# Altium PCB glasses_full_v1_small_revised.PcbDoc (part 2 of 2)
Units mm, origin at the board's own origin, x right, y up, seen from the top; angles counter-clockwise.
Board outline 153.91 x 57.09 mm, 2 copper layers (Top Layer, Bottom Layer); 20 components, 42 nets, 149 pads, 104 vias.
Unrouted connection lines stored in the file: 17.
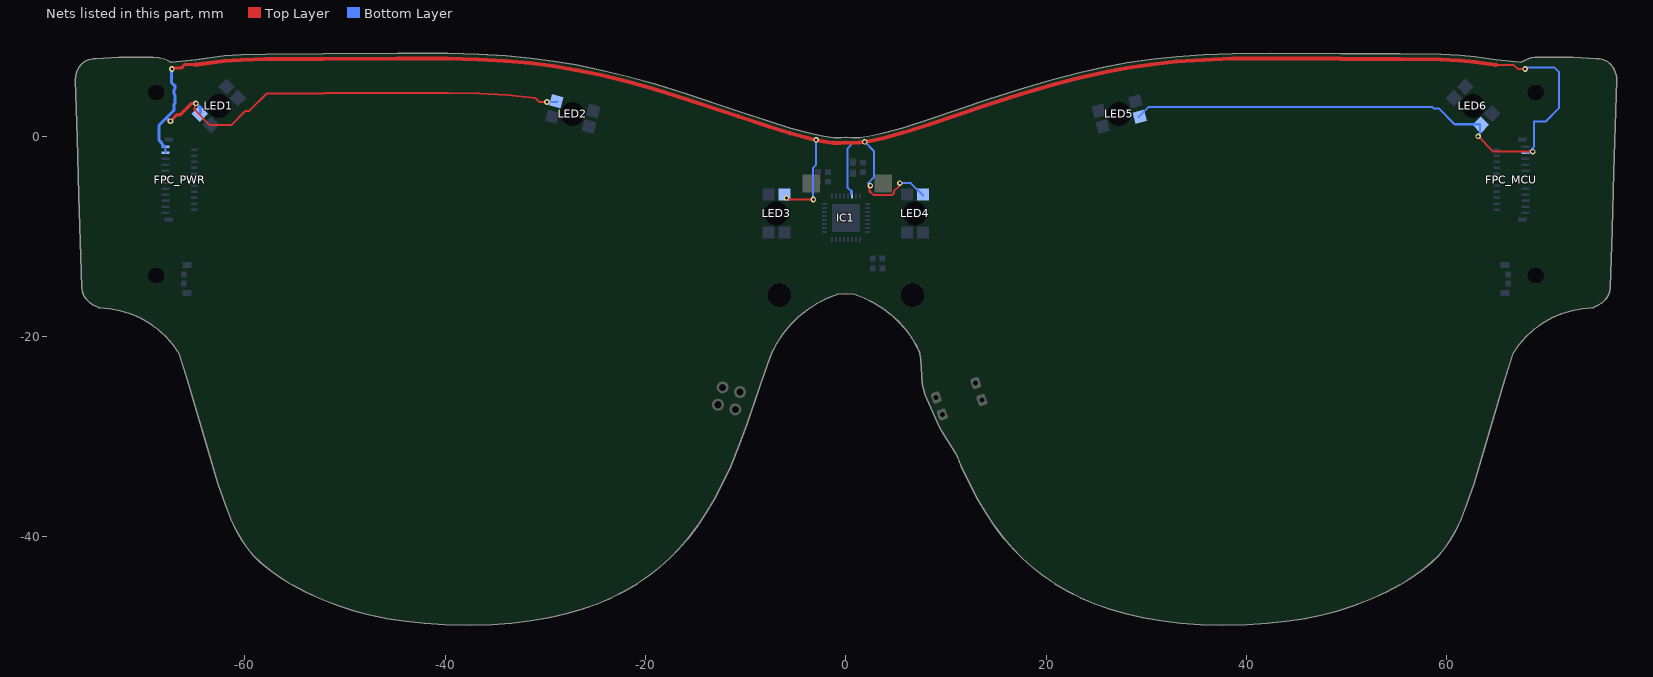
[diagram p2: the nets of this part, all layers, seen from the top]

## Via types
v1: diameter 0.559, hole 0.305, Top Layer to Bottom Layer, tented both sides, 100 vias
v2: diameter 0.559, hole 0.305, Top Layer to Bottom Layer, tented top, 4 vias

## Nets (pads, with @x,y where several pads share a name; then routed paths per layer and width w, separated by ;. In a path a pad name is that pad's centre, name@x,y a point inside that pad or via, vN(x,y) a via of type N, cw(c..) or ccw(c..) an arc to the next point about the centre after c; other vN are vias at no path point) (continued)
VBAT: FPC_MCU.3 FPC_PWR.21 FPC_PWR.23 IC1.30 LED1.1 LED2.1 LED3.1 LED4.1 LED5.1 LED6.1 | length 276.8
  Top Layer w0.203: v1(-64.897,3.302) -65.081,2.698 -63.5,1.118 -61.366,1.118 -59.944,2.54 -59.56,2.54 -57.822,4.279 -52.078,4.306 -44.635,4.353 -39.663,4.347 -36.586,4.266 -33.84,4.108 -31.024,3.846 -30.607,3.429 v1(-29.845,3.429) ; v1(-5.944,-6.147) -5.89,-6.147 -5.74,-6.297 -5.74,-6.299 v1(-3.251,-6.299) ; v1(2.438,-4.928) 2.438,-4.877 2.337,-4.775 2.337,-5.537 cw(c2.337,-5.782) 2.51,-5.609 2.769,-5.867 4.606,-5.867 4.79,-5.683 4.79,-5.495 5.408,-4.877 5.385,-4.854 v1(5.385,-4.674) ; v1(63.119,0) 64.643,-1.524 v1(68.58,-1.524) ; 64.904,7.148 66.649,7.148 67.066,6.731 v1(67.818,6.731)
  Top Layer w0.305: v1(-67.437,1.524) -66.802,2.159 -66.456,2.159 -65.313,3.302 v1(-64.897,3.302) ; v1(-67.3,6.731) -67.224,6.807 -66.364,6.807 -65.983,7.188 -64.962,7.188 -64.925,7.151
  Top Layer w0.406: -64.925,7.151 -62.084,7.518 -60.385,7.64 -57.949,7.708 -52.205,7.735 -44.762,7.782 -39.79,7.776 -36.713,7.695 -33.967,7.537 -31.529,7.31 -29.23,7.011 -26.979,6.633 -24.455,6.113 -21.824,5.469 -18.995,4.677 -15.829,3.695 -10.776,2.006 -7.721,0.984 -5.567,0.311 -3.625,-0.217 v1(-2.975,-0.354) -2.252,-0.507 -1.238,-0.64 -0.568,-0.661 -0.019,-0.608 0.416,-0.649 ; 0.547,-0.662 1.349,-0.626 v1(1.88,-0.549) 2.411,-0.471 3.826,-0.158 5.711,0.366 8.314,1.191 14.072,3.131 17.36,4.193 20.567,5.14 23.259,5.842 25.7,6.39 28.001,6.822 30.493,7.191 33.003,7.461 35.636,7.646 38.539,7.754 42.438,7.791 49.365,7.748 55.329,7.727 59.349,7.678 61.254,7.586 62.815,7.43 64.904,7.148
  Bottom Layer w0.203: FPC_PWR.23@-68.199,-1.046 -68.171,-1.018 FPC_PWR.23@-67.956,-1.018 FPC_PWR.21@-67.956,-1.618 ; v1(-29.845,3.429) -28.872,3.429 LED2.1@-28.815,3.487 ; v1(-3.251,-6.299) ccw(c-3.251,-6.198) -3.15,-6.198 -3.297,-6.05 -3.297,-3.17 -2.997,-2.87 v1@-2.997,-0.457 ; 0.551,-5.413 0.61,-5.471 0.61,-5.724 0.549,-5.724 0.515,-5.759 0.515,-5.468 0.178,-5.132 0.178,-1.194 0.823,-0.549 v1(1.88,-0.549) 2.794,-1.463 2.794,-4.097 2.217,-4.674 2.438,-4.895 v1(2.438,-4.928) ; v1(5.385,-4.674) 6.481,-4.674 LED4.1@7.707,-5.9 ; LED5.1@29.229,1.941 30.209,2.921 58.547,2.921 58.674,2.794 59.182,2.794 60.766,1.21 63.318,1.21 63.318,0.295 63.119,0.096 v1(63.119,0) ; v1(67.818,6.731) 67.914,6.731 68.041,6.858 70.764,6.858 71.222,6.401 71.222,2.845 69.853,1.477 68.707,1.477 68.707,-1.049 68.53,-1.225 68.53,-1.474 v1(68.58,-1.524) ; FPC_MCU.3@67.849,-1.618 68.119,-1.618 68.147,-1.59 68.147,-1.576 68.321,-1.402
  Bottom Layer w0.305: FPC_PWR.23@-68.199,-1.046 -68.199,-0.806 -68.361,-0.644 -68.361,-0.6 -68.581,-0.38 -68.581,1.102 -67.832,1.851 ; v1(-67.437,1.524) -67.505,1.524 -67.832,1.851 ; v1(-67.3,6.731) -67.3,6.426 -67.335,6.391 -67.335,5.367 -67.023,5.055 -66.98,5.055 -66.98,4.768 -67.081,4.666 -67.081,4.224 -66.98,4.122 -66.98,3.314 -67.083,3.211 -67.083,2.6 -67.832,1.851 ; v1(-64.897,3.302) -64.449,2.854 LED1.1@-64.449,2.341
  Bottom Layer w0.406: v1@-2.997,-0.457 -2.975,-0.435 v1(-2.975,-0.354)
pads on no net: FPC_MCU.7 FPC_MCU.9 FPC_MCU.13 FPC_MCU.15 FPC_MCU.19 FPC_MCU.MP1 FPC_MCU.MP2 FPC_PWR.1 FPC_PWR.3 FPC_PWR.5 FPC_PWR.8 FPC_PWR.9 FPC_PWR.11 FPC_PWR.15 FPC_PWR.17 FPC_PWR.MP1 FPC_PWR.MP2 LED1. LED2. LED3. LED4. LED5. LED6. LED7.1 LED8.1

## Polygon pours and split planes (outlines as drawn)
no net on Keep-Out Layer "hole2" (none, remove dead copper): 13.768,-31.086 13.77,-31.075 14.491,-27.287 14.524,-26.388 14.419,-25.461 14.3,-24.9 14.077,-24.372 13.757,-23.896 13.353,-23.49 12.879,-23.168 12.352,-22.942 12.139,-22.873 11.499,-22.582 10.944,-22.15 10.505,-21.6 10.066,-19.947 9.755,-18.446 9.58,-17.241 9.486,-16.026 9.481,-14.679 9.574,-13.333 9.769,-11.934 9.983,-10.884 10.256,-9.843 10.563,-8.929 10.851,-8.271 11.204,-7.648 11.663,-7.033 12.197,-6.475 12.75,-6.011 13.336,-5.594 14.262,-5.035 15.553,-4.384 17.101,-3.71 18.201,-3.28 19.312,-2.879 21.65,-2.114 24.016,-1.431 26.336,-0.835 28.674,-0.312 31.102,0.14 33.026,0.425 34.956,0.637 37.127,0.791 39.307,0.868 41.489,0.893 43.873,0.895 45.361,0.87 46.847,0.814 48.936,0.665 50.807,0.442 52.476,0.155 53.316,-0.029 54.152,-0.242 55.42,-0.634 56.656,-1.111 57.741,-1.622 58.711,-2.172 59.268,-2.54 59.805,-2.939 60.6,-3.631 61.322,-4.393 61.908,-5.135 62.486,-6.023 62.997,-6.993 63.436,-8.036 63.738,-8.926 63.995,-9.825 64.268,-10.936 64.405,-11.638 64.51,-12.347 64.618,-13.648 64.642,-14.466 64.641,-15.285 64.568,-17.237 64.46,-18.698 64.31,-20.15 64.02,-22.178 63.636,-24.191 63.3,-25.661 62.929,-27.123 62.055,-30.252 61.19,-33.031 60.53,-34.921 59.965,-36.317 59.432,-37.433 59.089,-38.055 58.714,-38.661 58.082,-39.525 57.373,-40.328 56.666,-40.998 55.825,-41.665 55.26,-42.052 54.677,-42.414 53.55,-43.026 52.219,-43.633 50.713,-44.214 49.004,-44.77 47.791,-45.11 46.568,-45.413 44.625,-45.823 42.666,-46.151 40.737,-46.39 38.848,-46.54 37.041,-46.599 35.3,-46.57 33.676,-46.458 32.122,-46.267 30.641,-46.001 29.205,-45.658 27.831,-45.244 26.512,-44.758 25.145,-44.152 23.952,-43.527 22.804,-42.833 21.712,-42.077 20.684,-41.265 19.588,-40.276 18.658,-39.319 17.79,-38.309 16.923,-37.152 16.1,-35.89 15.324,-34.519 14.594,-33.031 13.849,-31.299
no net on Keep-Out Layer "hole1" (none, remove dead copper): -12.333,-22.942 -12.86,-23.168 -13.334,-23.49 -13.738,-23.896 -14.058,-24.372 -14.281,-24.9 -14.4,-25.461 -14.505,-26.388 -14.471,-27.287 -13.869,-30.451 -13.83,-31.299 -14.575,-33.031 -15.305,-34.519 -16.081,-35.89 -16.903,-37.152 -17.771,-38.309 -18.638,-39.319 -19.568,-40.276 -20.664,-41.265 -21.692,-42.077 -22.784,-42.833 -23.932,-43.527 -25.126,-44.152 -26.493,-44.758 -27.812,-45.244 -29.185,-45.658 -30.622,-46.001 -32.103,-46.267 -33.656,-46.458 -35.281,-46.57 -37.022,-46.599 -38.829,-46.54 -40.718,-46.39 -42.647,-46.151 -44.605,-45.823 -46.549,-45.413 -47.772,-45.11 -48.984,-44.77 -50.693,-44.214 -52.199,-43.633 -53.53,-43.026 -54.658,-42.414 -55.241,-42.052 -55.805,-41.665 -56.646,-40.998 -57.354,-40.328 -58.063,-39.525 -58.694,-38.661 -59.07,-38.055 -59.413,-37.433 -59.945,-36.317 -60.51,-34.921 -61.17,-33.031 -62.036,-30.252 -62.909,-27.123 -63.281,-25.661 -63.617,-24.191 -64,-22.178 -64.291,-20.151 -64.441,-18.698 -64.548,-17.237 -64.621,-15.285 -64.622,-14.466 -64.598,-13.648 -64.491,-12.347 -64.386,-11.638 -64.248,-10.936 -63.976,-9.825 -63.719,-8.926 -63.417,-8.036 -62.978,-6.993 -62.466,-6.023 -61.888,-5.135 -61.303,-4.393 -60.58,-3.631 -59.786,-2.939 -59.249,-2.54 -58.692,-2.172 -57.722,-1.622 -56.637,-1.111 -55.401,-0.634 -54.133,-0.242 -53.297,-0.029 -52.457,0.155 -50.787,0.442 -48.917,0.665 -46.827,0.814 -45.342,0.87 -43.854,0.895 -41.47,0.893 -39.288,0.868 -37.107,0.791 -34.937,0.637 -33.006,0.425 -31.083,0.14 -28.654,-0.312 -26.317,-0.835 -23.997,-1.431 -21.631,-2.114 -19.293,-2.879 -18.182,-3.28 -17.082,-3.71 -15.533,-4.384 -14.243,-5.035 -13.317,-5.594 -12.731,-6.011 -12.178,-6.475 -11.644,-7.033 -11.185,-7.648 -10.832,-8.271 -10.544,-8.929 -10.237,-9.843 -9.964,-10.884 -9.75,-11.934 -9.554,-13.333 -9.462,-14.679 -9.466,-16.026 -9.561,-17.241 -9.736,-18.446 -10.047,-19.947 -10.486,-21.6 -10.925,-22.15 -11.479,-22.582 -12.119,-22.873
GND on Top Layer "Top Layer-GND" (solid, remove dead copper, pour order 14): 248 vertices, not listed, extent -77.049,-49.048 76.865,8.046
GND on Bottom Layer "Bottom Layer-GND" (solid, remove dead copper, pour order 12): 248 vertices, not listed, extent -76.947,-48.794 76.967,8.3

## Keep-outs
Bottom Layer:
  rectangle: 68.275,6.909 68.529,8.179
Keep-Out Layer:
  circle w0.05: c-68.859,4.39 r1.7
  circle w0.05: c-68.859,-13.907 r1.7
  circle w0.05: c68.879,-13.907 r1.7
  circle w0.05: c68.879,4.39 r1.7
  rectangle: -74.828,-33.731 -52.832,-17.729
  rectangle: 58.725,-33.782 80.721,-17.78
  rectangle: -67.462,-58.928 74.981,-29.921
  lines w0.2: -74.766,-17.131 -74.765,-17.132 ; -74.764,-17.132 -74.765,-17.132 ; -65.818,-24.474 -65.818,-24.475 ; -65.817,-24.476 -65.818,-24.475 ; -64.908,7.758 -64.907,7.758 ; -64.906,7.758 -64.907,7.758 ; -7.662,1.588 -7.661,1.588 ; -7.66,1.587 -7.661,1.588 ; 8.311,1.795 8.312,1.795 ; 8.313,1.795 8.312,1.795 ; 65.837,-24.476 65.837,-24.475 ; 65.837,-24.474 65.837,-24.475 ; -77.047,5.629 cw(c-76.947,5.632) -77.047,5.641 ; -77.047,5.629 cw(c-76.947,5.632) -77.047,5.641 ; -77.047,5.629 -76.871,-0.138 ; -77.047,5.641 -77.01,6.074 ; -77.047,5.641 -77.047,5.641 ; -77.01,6.074 cw(c-76.91,6.065) -77.006,6.093 ; -77.01,6.074 -77.01,6.074 cw(c-76.91,6.065) -77.006,6.093 ; -77.006,6.093 -76.885,6.517 ; -76.885,6.517 cw(c-76.789,6.489) -76.878,6.535 ; -76.885,6.517 cw(c-76.789,6.489) -76.878,6.535 ; -76.878,6.535 -76.686,6.908 ; -76.871,-0.138 ccw(c-76.771,-0.135) -76.871,-0.138 ; -76.871,-0.138 ccw(c-76.771,-0.135) -76.871,-0.138 ; -76.871,-0.138 -76.871,-0.138 ; -76.871,-0.138 -76.691,-5.906 ; -76.691,-5.907 cw(c-76.591,-5.903) -76.691,-5.906 ; -76.691,-5.906 ccw(c-76.591,-5.903) -76.691,-5.906 ; -76.691,-5.906 cw(c-76.591,-5.903) -76.691,-5.906 ; -76.691,-5.906 -76.691,-5.906 ; -76.691,-5.906 -76.691,-5.907 ; -76.691,-5.907 -76.399,-15.136 ; -76.691,-5.906 -76.691,-5.906 ; -76.686,6.908 cw(c-76.597,6.863) -76.678,6.921 ; -76.686,6.908 cw(c-76.597,6.863) -76.678,6.921 ; -76.678,6.922 ccw(c-76.597,6.863) -76.678,6.921 ; -76.678,6.922 -76.541,7.11 ; -76.678,6.921 -76.678,6.922 ; -76.678,6.921 -76.678,6.921 ; -76.541,7.11 cw(c-76.46,7.051) -76.533,7.118 ; -76.54,7.11 ccw(c-76.46,7.051) -76.541,7.11 ; -76.54,7.11 cw(c-76.46,7.051) -76.533,7.118 ; -76.541,7.11 -76.54,7.11 ; -76.541,7.11 -76.541,7.11 ; -76.533,7.118 -76.387,7.278 ; -76.399,-15.136 ccw(c-76.299,-15.133) -76.399,-15.146 ; -76.399,-15.136 ccw(c-76.299,-15.133) -76.399,-15.146 ; -76.399,-15.136 -76.399,-15.136 ; -76.399,-15.146 -76.359,-15.445 ; -76.387,7.278 cw(c-76.314,7.21) -76.38,7.285 ; -76.387,7.278 cw(c-76.314,7.21) -76.38,7.285 ; -76.38,7.285 -76.229,7.418 ; -76.359,-15.445 ccw(c-76.26,-15.432) -76.356,-15.461 ; -76.359,-15.445 ccw(c-76.26,-15.432) -76.356,-15.461 ; -76.356,-15.461 -76.265,-15.755 ; -76.265,-15.755 ccw(c-76.17,-15.726) -76.258,-15.773 ; -76.265,-15.755 ccw(c-76.17,-15.726) -76.258,-15.772 ; -76.258,-15.772 -76.258,-15.773 ; -76.258,-15.773 -76.08,-16.113 ; -76.229,7.418 cw(c-76.163,7.343) -76.222,7.424 ; -76.229,7.418 cw(c-76.163,7.343) -76.223,7.423 -76.222,7.424 ; -76.222,7.424 -76.122,7.498 ; -76.122,7.498 cw(c-76.062,7.419) -76.117,7.502 -76.116,7.503 ; -76.122,7.498 -76.122,7.499 cw(c-76.062,7.419) -76.116,7.503 ; -76.116,7.503 -76.012,7.571 ; -76.08,-16.114 ccw(c-75.991,-16.067) -76.069,-16.13 ; -76.08,-16.113 ccw(c-75.991,-16.067) -76.069,-16.13 -76.069,-16.13 ; -76.08,-16.113 -76.08,-16.114 ; -76.069,-16.13 -75.812,-16.449 ; -76.012,7.571 cw(c-75.957,7.487) -76,7.578 ; -76.012,7.571 -76.012,7.571 cw(c-75.957,7.487) -76,7.578 ; -76,7.578 -75.678,7.733 ; -76,7.578 -76,7.578 ; -75.812,-16.449 ccw(c-75.734,-16.387) -75.801,-16.461 -75.801,-16.461 ; -75.812,-16.449 -75.811,-16.45 ccw(c-75.734,-16.387) -75.801,-16.461 ; -75.801,-16.461 -75.543,-16.698 ; -75.677,7.733 cw(c-75.634,7.643) -75.659,7.74 ; -75.678,7.733 cw(c-75.634,7.643) -75.659,7.74 ; -75.678,7.733 -75.677,7.733 ; -75.659,7.74 -75.366,7.818 ; -75.543,-16.698 ccw(c-75.475,-16.624) -75.531,-16.707 ; -75.542,-16.698 ccw(c-75.475,-16.624) -75.531,-16.707 ; -75.543,-16.698 -75.542,-16.698 ; -75.531,-16.707 -75.267,-16.887 ; -75.366,7.818 cw(c-75.34,7.721) -75.35,7.82 ; -75.366,7.818 cw(c-75.34,7.721) -75.35,7.82 ; -75.35,7.82 -75.131,7.841 ; -75.267,-16.887 ccw(c-75.21,-16.805) -75.256,-16.894 ; -75.267,-16.887 ccw(c-75.21,-16.805) -75.256,-16.894 ; -75.256,-16.894 -74.933,-17.059 ; -75.131,7.841 cw(c-75.122,7.742) -75.118,7.842 ; -75.131,7.841 cw(c-75.122,7.742) -75.117,7.842 ; -75.117,7.842 ccw(c-75.122,7.742) -75.118,7.842 ; -75.117,7.842 -74.934,7.833 -72.613,8.02 ; -75.117,7.842 -75.117,7.842 ; -75.118,7.842 -75.117,7.842 ; -74.933,-17.059 ccw(c-74.888,-16.97) -74.927,-17.062 -74.927,-17.062 ; -74.933,-17.059 ccw(c-74.888,-16.97) -74.927,-17.062 ; -74.927,-17.062 -74.765,-17.132 ; -74.765,-17.132 -74.691,-17.165 -74.666,-17.179 ; -74.666,-17.179 ccw(c-74.578,-17.133) -74.584,-17.232 ; -74.666,-17.179 ccw(c-74.578,-17.133) -74.585,-17.232 -74.584,-17.232 ; -74.584,-17.232 -73.527,-17.305 -72.489,-17.494 -71.48,-17.799 -70.51,-18.214 -69.594,-18.736 -68.742,-19.357 -67.964,-20.07 -67.272,-20.866 -66.679,-21.726 -65.818,-24.475 ; -72.613,8.02 cw(c-72.605,7.92) -72.605,8.02 ; -72.613,8.02 ccw(c-72.605,7.92) -72.613,8.02 ; -72.613,8.02 cw(c-72.605,7.92) -72.605,8.02 ; -72.613,8.02 -72.613,8.02 ; -72.613,8.02 -72.613,8.02 ; -72.605,8.02 -69.151,8.02 ; -69.151,8.02 cw(c-69.151,7.92) -69.142,8.02 ; -69.151,8.02 cw(c-69.151,7.92) -69.142,8.02 ; -69.142,8.02 -68.59,7.97 ; -68.59,7.97 cw(c-68.599,7.871) -68.573,7.967 ; -68.59,7.97 cw(c-68.599,7.871) -68.573,7.967 ; -68.573,7.967 -68.038,7.823 ; -68.038,7.823 cw(c-68.064,7.727) -68.025,7.819 -68.025,7.819 ; -68.038,7.823 cw(c-68.064,7.727) -68.025,7.819 ; -68.025,7.819 -67.673,7.668 ; -67.673,7.668 cw(c-67.712,7.576) -67.662,7.663 ; -67.672,7.668 cw(c-67.712,7.576) -67.662,7.663 ; -67.673,7.668 -67.672,7.668 ; -67.662,7.663 -67.357,7.49 -64.907,7.758 ; -65.818,-24.475 -63.88,-31.087 ; -64.907,7.758 -62.069,8.126 ; -63.88,-31.087 ccw(c-63.784,-31.059) -63.879,-31.088 ; -63.88,-31.087 ccw(c-63.784,-31.059) -63.879,-31.088 ; -63.88,-31.087 ccw(c-63.784,-31.059) -63.88,-31.087 ; -63.88,-31.087 -63.88,-31.087 ; -63.88,-31.087 -63.88,-31.087 ; -63.879,-31.088 -62.795,-34.666 ; -62.795,-34.666 ccw(c-62.699,-34.637) -62.794,-34.669 ; -62.795,-34.666 ccw(c-62.699,-34.637) -62.794,-34.67 ; -62.794,-34.669 -62.794,-34.67 ; -62.794,-34.67 -62.029,-36.908 ; -62.069,8.126 cw(c-62.055,8.027) -62.062,8.126 ; -62.069,8.126 -62.068,8.126 cw(c-62.055,8.027) -62.062,8.126 ; -62.062,8.126 -60.363,8.248 ; -62.029,-36.908 ccw(c-61.934,-36.876) -62.027,-36.912 ; -62.029,-36.908 ccw(c-61.934,-36.876) -62.027,-36.912 ; -62.029,-36.908 -62.029,-36.908 ; -62.027,-36.912 -61.491,-38.273 ; -61.491,-38.273 ccw(c-61.398,-38.237) -61.489,-38.279 ; -61.491,-38.273 ccw(c-61.398,-38.237) -61.488,-38.279 ; -61.489,-38.279 -61.488,-38.279 ; -61.488,-38.279 -60.966,-39.396 ; -60.966,-39.396 ccw(c-60.875,-39.354) -60.962,-39.403 ; -60.965,-39.396 ccw(c-60.875,-39.354) -60.962,-39.403 ; -60.966,-39.396 -60.965,-39.396 ; -60.962,-39.403 ccw(c-60.875,-39.354) -60.962,-39.403 ; -60.962,-39.403 -60.962,-39.403 ; -60.962,-39.403 -60.962,-39.403 ; -60.962,-39.403 -60.416,-40.365 ; -60.416,-40.365 ccw(c-60.329,-40.316) -60.411,-40.372 ; -60.416,-40.365 ccw(c-60.329,-40.316) -60.416,-40.365 ; -60.416,-40.365 ccw(c-60.329,-40.316) -60.411,-40.372 ; -60.416,-40.365 -60.416,-40.365 ; -60.416,-40.365 -60.416,-40.365 ; -60.411,-40.372 -59.829,-41.214 ; -60.363,8.248 cw(c-60.356,8.149) -60.359,8.249 ; -60.363,8.248 cw(c-60.356,8.149) -60.359,8.249 ; -60.359,8.249 -57.922,8.316 ; -59.829,-41.214 ccw(c-59.747,-41.157) -59.823,-41.222 ; -59.829,-41.214 ccw(c-59.747,-41.157) -59.823,-41.222 ; -59.823,-41.222 -59.242,-41.913 ; -59.242,-41.913 ccw(c-59.165,-41.848) -59.235,-41.92 ; -59.242,-41.913 ccw(c-59.165,-41.848) -59.235,-41.92 -59.235,-41.92 ; -59.235,-41.92 -58.493,-42.646 ; -58.493,-42.646 ccw(c-58.423,-42.575) -58.487,-42.652 ; -58.493,-42.646 -58.493,-42.646 ccw(c-58.423,-42.575) -58.487,-42.652 ; -58.487,-42.652 -57.566,-43.41 ; -57.922,8.316 cw(c-57.919,8.216) -57.92,8.316 ; -57.922,8.316 cw(c-57.919,8.216) -57.92,8.316 ; -57.92,8.316 -52.176,8.344 ; -57.566,-43.41 ccw(c-57.503,-43.332) -57.56,-43.414 ; -57.566,-43.41 ccw(c-57.503,-43.332) -57.56,-43.414 ; -57.56,-43.414 ccw(c-57.503,-43.332) -57.56,-43.414 ; -57.56,-43.414 -56.522,-44.148 ; -57.56,-43.414 -57.56,-43.414 ; -57.56,-43.414 -57.56,-43.414 ; -56.522,-44.148 ccw(c-56.464,-44.067) -56.516,-44.152 ; -56.522,-44.148 cw(c-56.464,-44.067) -56.522,-44.148 ; -56.522,-44.148 -56.522,-44.148 ; -56.522,-44.148 ccw(c-56.464,-44.067) -56.517,-44.152 ; -56.522,-44.148 -56.522,-44.148 ; -56.516,-44.152 cw(c-56.464,-44.067) -56.517,-44.152 ; -56.516,-44.152 -55.335,-44.872 ; -56.516,-44.152 -56.516,-44.152 ; -56.517,-44.152 -56.516,-44.152 ; -55.335,-44.872 ccw(c-55.283,-44.787) -55.335,-44.873 ; -55.335,-44.872 -55.335,-44.872 ; -55.335,-44.873 ccw(c-55.283,-44.787) -55.329,-44.876 ; -55.335,-44.872 ccw(c-55.283,-44.787) -55.329,-44.876 ; -55.335,-44.872 -55.335,-44.873 ; -55.329,-44.876 -53.958,-45.597 ; -53.958,-45.597 ccw(c-53.911,-45.509) -53.953,-45.6 ; -53.958,-45.597 ccw(c-53.911,-45.509) -53.953,-45.6 ; -53.952,-45.6 cw(c-53.911,-45.509) -53.953,-45.6 ; -53.952,-45.6 -52.34,-46.333 ; -53.953,-45.6 -53.952,-45.6 ; -53.953,-45.6 -53.953,-45.6 ; -52.339,-46.333 ccw(c-52.298,-46.242) -52.334,-46.335 ; -52.339,-46.333 cw(c-52.298,-46.242) -52.34,-46.333 ; -52.339,-46.333 -52.339,-46.333 ; -52.339,-46.333 ccw(c-52.298,-46.242) -52.334,-46.335 ; -52.34,-46.333 -52.339,-46.333 ; -52.334,-46.335 ccw(c-52.298,-46.242) -52.334,-46.335 ; -52.334,-46.335 -52.334,-46.335 ; -52.334,-46.335 -52.334,-46.335 ; -52.334,-46.335 -50.7,-46.967 ; -52.176,8.344 ccw(c-52.176,8.244) -52.176,8.344 ; -52.176,8.344 -44.734,8.391 ; -52.176,8.344 -52.176,8.344 ; -50.7,-46.967 ccw(c-50.664,-46.873) -50.699,-46.967 ; -50.7,-46.967 ccw(c-50.664,-46.873) -50.694,-46.969 ; -50.7,-46.967 -50.699,-46.967 ; -50.7,-46.967 -50.7,-46.967 ; -50.699,-46.967 ccw(c-50.664,-46.873) -50.694,-46.969 ; -50.694,-46.969 -49.044,-47.499 ; -50.694,-46.969 -50.694,-46.969 ; -49.044,-47.499 ccw(c-49.013,-47.404) -49.038,-47.5 ; -49.043,-47.499 ccw(c-49.013,-47.404) -49.038,-47.5 ; -49.044,-47.499 -49.043,-47.499 ; -49.038,-47.5 -47.472,-47.908 ; -47.472,-47.908 ccw(c-47.447,-47.811) -47.467,-47.909 ; -47.472,-47.908 ccw(c-47.447,-47.811) -47.467,-47.909 ; -47.467,-47.909 cw(c-47.447,-47.811) -47.467,-47.909 ; -47.467,-47.909 -45.797,-48.251 ; -47.467,-47.909 -47.467,-47.909 ; -47.467,-47.909 -47.467,-47.909 ; -45.797,-48.251 ccw(c-45.776,-48.153) -45.792,-48.252 ; -45.796,-48.251 ccw(c-45.776,-48.153) -45.792,-48.252 ; -45.797,-48.251 ccw(c-45.776,-48.153) -45.796,-48.251 ; -45.797,-48.251 -45.796,-48.251 ; -45.797,-48.251 -45.797,-48.251 ; -45.792,-48.252 ccw(c-45.776,-48.153) -45.791,-48.252 ; -45.791,-48.252 -44.006,-48.525 ; -45.792,-48.252 -45.791,-48.252 ; -45.792,-48.252 -45.792,-48.252 ; -44.734,8.391 cw(c-44.733,8.291) -44.733,8.391 ; -44.734,8.391 cw(c-44.733,8.291) -44.733,8.391 ; -44.734,8.391 -44.734,8.391 ; -44.733,8.391 -39.76,8.385 ; -44.006,-48.525 ccw(c-43.991,-48.426) -44.001,-48.526 ; -44.006,-48.525 ccw(c-43.991,-48.426) -44.006,-48.525 ; -44.006,-48.525 ccw(c-43.991,-48.426) -44.001,-48.526 ; -44.006,-48.525 -44.006,-48.525 ; -44.006,-48.525 -44.006,-48.525 ; -44.001,-48.526 -42.09,-48.727 ; -44.001,-48.526 -44.001,-48.526 ; -42.09,-48.727 ccw(c-42.079,-48.627) -42.085,-48.727 ; -42.089,-48.727 ccw(c-42.079,-48.627) -42.085,-48.727 ; -42.09,-48.727 -42.089,-48.727 ; -42.085,-48.727 -40.006,-48.852 ; -42.085,-48.727 -42.085,-48.727 ; -40.006,-48.852 ccw(c-40,-48.752) -40.002,-48.852 ; -40.006,-48.852 ccw(c-40,-48.752) -40.002,-48.852 ; -40.006,-48.852 -40.006,-48.852 ; -40.002,-48.852 -37.62,-48.894 ; -39.76,8.385 cw(c-39.761,8.285) -39.758,8.385 ; -39.76,8.385 cw(c-39.761,8.285) -39.758,8.385 ; -39.758,8.385 -36.682,8.304 ; -39.758,8.385 -39.758,8.385 ; -37.62,-48.894 ccw(c-37.618,-48.794) -37.616,-48.894 ; -37.62,-48.894 ccw(c-37.618,-48.794) -37.616,-48.894 ; -37.616,-48.894 -35.421,-48.842 ; -36.681,8.304 cw(c-36.684,8.204) -36.678,8.303 ; -36.682,8.304 cw(c-36.684,8.204) -36.678,8.303 ; -36.682,8.304 -36.681,8.304 ; -36.678,8.303 -33.932,8.145 ; -35.421,-48.842 ccw(c-35.424,-48.742) -35.416,-48.842 ; -35.421,-48.842 ccw(c-35.424,-48.742) -35.417,-48.842 ; -35.416,-48.842 -33.373,-48.701 ; -35.417,-48.842 -35.416,-48.842 ; -33.932,8.145 cw(c-33.938,8.046) -33.928,8.145 ; -33.932,8.145 cw(c-33.938,8.046) -33.929,8.145 ; -33.928,8.145 -31.491,7.918 ; -33.929,8.145 -33.928,8.145 ; -33.372,-48.701 ccw(c-33.379,-48.601) -33.367,-48.701 ; -33.373,-48.701 ccw(c-33.379,-48.601) -33.368,-48.701 ; -33.373,-48.701 -33.372,-48.701 ; -33.367,-48.701 -31.449,-48.475 ; -33.368,-48.701 -33.367,-48.701 ; -31.491,7.918 cw(c-31.5,7.818) -31.487,7.918 ; -31.491,7.918 -31.49,7.918 cw(c-31.5,7.818) -31.487,7.918 ; -31.487,7.918 -29.188,7.618 ; -31.449,-48.475 ccw(c-31.46,-48.376) -31.444,-48.475 ; -31.449,-48.475 -31.449,-48.475 ccw(c-31.46,-48.376) -31.444,-48.475 ; -31.444,-48.475 -29.633,-48.167 ; -29.633,-48.167 ccw(c-29.65,-48.068) -29.628,-48.166 ; -29.633,-48.167 ccw(c-29.65,-48.068) -29.628,-48.166 ; -29.628,-48.166 -27.918,-47.779 ; -29.188,7.618 cw(c-29.201,7.519) -29.184,7.618 ; -29.188,7.618 cw(c-29.201,7.519) -29.184,7.618 ; -29.184,7.618 -26.933,7.241 ; -27.918,-47.779 ccw(c-27.94,-47.681) -27.913,-47.777 ; -27.918,-47.779 ccw(c-27.94,-47.681) -27.913,-47.777 ; -27.913,-47.777 ccw(c-27.94,-47.681) -27.912,-47.777 ; -27.912,-47.777 -26.312,-47.318 ; -27.913,-47.777 -27.912,-47.777 ; -27.913,-47.777 -27.913,-47.777 ; -26.933,7.241 cw(c-26.95,7.142) -26.929,7.24 ; -26.933,7.241 cw(c-26.95,7.142) -26.929,7.24 ; -26.929,7.24 -24.406,6.72 ; -26.312,-47.318 ccw(c-26.339,-47.222) -26.306,-47.316 ; -26.312,-47.318 ccw(c-26.339,-47.222) -26.306,-47.316 ; -26.312,-47.318 ccw(c-26.339,-47.222) -26.312,-47.318 ; -26.312,-47.318 -26.312,-47.318 ; -26.312,-47.318 -26.312,-47.318 ; -26.306,-47.316 -24.809,-46.787 ; -26.306,-47.316 -26.306,-47.316 ; -24.808,-46.787 ccw(c-24.842,-46.693) -24.802,-46.785 ; -24.809,-46.787 ccw(c-24.842,-46.693) -24.802,-46.785 ; -24.809,-46.787 -24.808,-46.787 ; -24.802,-46.785 -23.401,-46.188 ; -24.406,6.72 cw(c-24.426,6.622) -24.402,6.719 ; -24.406,6.72 cw(c-24.426,6.622) -24.402,6.719 ; -24.402,6.719 -21.772,6.075 ; -24.402,6.719 -24.402,6.719 ; -23.401,-46.188 ccw(c-23.44,-46.096) -23.395,-46.185 ; -23.401,-46.188 ccw(c-23.44,-46.096) -23.395,-46.185 ; -23.395,-46.185 -22.047,-45.503 ; -22.047,-45.503 ccw(c-22.092,-45.414) -22.041,-45.5 ; -22.047,-45.503 ccw(c-22.092,-45.414) -22.041,-45.5 ; -22.041,-45.5 -20.758,-44.737 ; -21.772,6.075 cw(c-21.795,5.978) -21.768,6.074 ; -21.772,6.075 cw(c-21.795,5.978) -21.768,6.074 ; -21.772,6.075 -21.772,6.075 ; -21.768,6.074 -18.939,5.282 ; -21.768,6.074 -21.768,6.074 ; -20.758,-44.737 ccw(c-20.809,-44.651) -20.752,-44.734 ; -20.758,-44.737 ccw(c-20.809,-44.651) -20.752,-44.734 ; -20.752,-44.734 -19.541,-43.898 ; -19.541,-43.898 ccw(c-19.598,-43.815) -19.536,-43.894 ; -19.541,-43.898 ccw(c-19.598,-43.815) -19.536,-43.894 ; -19.536,-43.894 -18.497,-43.07 ; -18.939,5.282 cw(c-18.966,5.186) -18.936,5.282 ; -18.939,5.282 cw(c-18.966,5.186) -18.936,5.281 ; -18.939,5.282 -18.939,5.282 ; -18.936,5.281 ccw(c-18.966,5.186) -18.936,5.282 ; -18.936,5.281 -15.771,4.299 ; -18.936,5.281 -18.936,5.281 ; -18.936,5.282 -18.936,5.281 ; -18.497,-43.07 ccw(c-18.559,-42.992) -18.492,-43.066 ; -18.497,-43.07 ccw(c-18.559,-42.992) -18.492,-43.066 ; -18.492,-43.066 -17.493,-42.165 ; -17.493,-42.165 ccw(c-17.56,-42.091) -17.489,-42.161 -17.488,-42.161 ; -17.493,-42.165 ccw(c-17.56,-42.091) -17.488,-42.161 ; -17.488,-42.161 -16.535,-41.187 ; -16.535,-41.187 ccw(c-16.606,-41.117) -16.53,-41.182 ; -16.535,-41.187 -16.534,-41.187 ccw(c-16.606,-41.117) -16.53,-41.182 ; -16.53,-41.182 -15.626,-40.138 ; -15.771,4.299 cw(c-15.8,4.204) -15.77,4.299 ; -15.771,4.299 -15.771,4.299 ; -15.771,4.299 cw(c-15.8,4.204) -15.768,4.299 ; -15.77,4.299 cw(c-15.8,4.204) -15.768,4.299 ; -15.771,4.299 -15.77,4.299 ; -15.768,4.299 -10.715,2.609 ; -15.626,-40.138 ccw(c-15.701,-40.072) -15.622,-40.133 ; -15.626,-40.138 ccw(c-15.701,-40.072) -15.622,-40.133 ; -15.622,-40.133 -14.75,-38.992 ; -15.622,-40.133 -15.622,-40.133 ; -14.75,-38.992 ccw(c-14.829,-38.931) -14.746,-38.987 ; -14.75,-38.992 -14.749,-38.992 ccw(c-14.829,-38.931) -14.746,-38.987 ; -14.746,-38.987 ccw(c-14.829,-38.931) -14.746,-38.987 ; -14.746,-38.987 -14.746,-38.987 ; -14.746,-38.987 -14.746,-38.987 ; -14.746,-38.987 -13.896,-37.727 ; -13.896,-37.727 ccw(c-13.979,-37.671) -13.896,-37.727 ; -13.896,-37.727 -13.896,-37.727 ; -13.896,-37.727 ccw(c-13.979,-37.671) -13.893,-37.722 ; -13.896,-37.727 ccw(c-13.979,-37.671) -13.893,-37.723 ; -13.896,-37.727 -13.896,-37.727 ; -13.893,-37.723 ccw(c-13.979,-37.671) -13.893,-37.722 ; -13.893,-37.722 -13.063,-36.329 ; -13.893,-37.722 -13.893,-37.722 ; -13.893,-37.723 -13.893,-37.722 ; -13.063,-36.329 ccw(c-13.149,-36.278) -13.063,-36.329 ; -13.063,-36.329 -13.063,-36.329 ; -13.063,-36.329 ccw(c-13.149,-36.278) -13.06,-36.324 ; -13.063,-36.329 ccw(c-13.149,-36.278) -13.06,-36.324 ; -13.063,-36.329 -13.063,-36.329 ; -13.06,-36.324 -12.246,-34.776 ; -12.246,-34.776 ccw(c-12.334,-34.729) -12.244,-34.771 ; -12.246,-34.776 ccw(c-12.334,-34.729) -12.244,-34.771 ; -12.244,-34.771 -11.426,-33.008 ; -11.426,-33.008 ccw(c-11.516,-32.966) -11.424,-33.004 ; -11.426,-33.008 ccw(c-11.516,-32.966) -11.424,-33.004 ; -11.424,-33.004 -10.548,-30.865 ; -10.715,2.609 ccw(c-10.747,2.514) -10.715,2.609 ; -10.715,2.609 ccw(c-10.747,2.514) -10.715,2.609 ; -10.715,2.609 -7.661,1.588 ; -10.548,-30.865 ccw(c-10.64,-30.827) -10.546,-30.862 ; -10.548,-30.865 ccw(c-10.64,-30.827) -10.546,-30.862 ; -10.546,-30.862 -9.751,-28.708 ; -9.751,-28.708 ccw(c-9.845,-28.673) -9.751,-28.706 ; -9.751,-28.708 ccw(c-9.845,-28.673) -9.751,-28.705 ; -9.751,-28.705 -8.486,-25.031 ; -9.751,-28.706 -9.751,-28.705 ; -8.486,-25.031 ccw(c-8.581,-24.999) -8.486,-25.03 ; -8.486,-25.031 ccw(c-8.581,-24.999) -8.486,-25.03 ; -8.486,-25.031 -8.486,-25.031 ; -8.486,-25.03 -7.72,-22.735 -7.307,-21.685 -6.79,-20.686 -6.171,-19.747 -5.458,-18.877 -4.659,-18.085 -3.782,-17.381 -2.836,-16.771 -1.833,-16.263 -0.789,-15.865 0.01,-15.792 0.809,-15.865 1.778,-16.231 2.714,-16.692 3.602,-17.241 4.433,-17.873 5.199,-18.582 5.893,-19.361 6.509,-20.204 7.039,-21.1 7.268,-21.671 7.372,-22.279 7.527,-24.73 ; -8.486,-25.03 -8.486,-25.03 ; -7.661,1.588 -5.51,0.916 -3.573,0.389 -2.206,0.1 -1.201,-0.032 -0.542,-0.053 0,0 ; 0,0 cw(c0.01,-0.1) 0.019,0 ; 0,0 cw(c0.01,-0.1) 0.019,0 ; 0.019,0 0.579,-0.053 1.369,-0.018 2.422,0.136 3.831,0.448 5.712,0.97 8.312,1.795 ; 7.527,-24.73 ccw(c7.627,-24.724) 7.53,-24.748 ; 7.527,-24.73 ccw(c7.627,-24.724) 7.53,-24.748 ; 7.53,-24.748 7.78,-25.77 ; 7.78,-25.77 ccw(c7.877,-25.746) 7.785,-25.787 ; 7.78,-25.77 ccw(c7.877,-25.746) 7.786,-25.787 ; 7.785,-25.787 7.786,-25.787 ; 7.786,-25.787 9.219,-29.032 ; 8.312,1.795 14.069,3.735 ; 9.22,-29.033 ccw(c9.311,-28.992) 9.223,-29.039 ; 9.219,-29.032 ccw(c9.311,-28.992) 9.223,-29.039 ; 9.219,-29.032 9.22,-29.033 ; 9.223,-29.039 9.426,-29.422 ; 9.426,-29.422 ccw(c9.514,-29.375) 9.43,-29.428 ; 9.426,-29.422 ccw(c9.514,-29.375) 9.43,-29.428 ; 9.43,-29.428 cw(c9.514,-29.375) 9.43,-29.428 ; 9.43,-29.428 9.43,-29.428 ; 9.43,-29.428 9.43,-29.428 ; 9.43,-29.428 10.873,-31.728 11.105,-32.178 11.443,-33.004 ; 11.443,-33.004 ccw(c11.536,-32.966) 11.445,-33.008 ; 11.443,-33.004 ccw(c11.536,-32.966) 11.445,-33.008 ; 11.445,-33.008 12.263,-34.771 ; 12.263,-34.771 ccw(c12.354,-34.729) 12.265,-34.776 ; 12.263,-34.771 ccw(c12.354,-34.729) 12.265,-34.776 ; 12.265,-34.776 13.08,-36.324 ; 13.08,-36.324 ccw(c13.168,-36.278) 13.082,-36.329 ; 13.08,-36.324 ccw(c13.168,-36.278) 13.082,-36.329 ; 13.082,-36.329 cw(c13.168,-36.278) 13.082,-36.329 ; 13.082,-36.329 13.082,-36.329 ; 13.082,-36.329 13.912,-37.722 ; 13.082,-36.329 13.082,-36.329 ; 13.912,-37.722 ccw(c13.998,-37.671) 13.915,-37.727 ; 13.912,-37.723 ccw(c13.998,-37.671) 13.915,-37.727 ; 13.912,-37.722 ccw(c13.998,-37.671) 13.912,-37.723 ; 13.912,-37.722 13.912,-37.722 ; 13.912,-37.722 13.912,-37.723 ; 13.915,-37.727 cw(c13.998,-37.671) 13.915,-37.727 ; 13.915,-37.727 13.915,-37.727 ; 13.915,-37.727 14.765,-38.987 ; 13.915,-37.727 13.915,-37.727 ; 14.069,3.735 cw(c14.101,3.64) 14.071,3.735 ; 14.069,3.735 cw(c14.101,3.64) 14.071,3.735 ; 14.071,3.735 17.358,4.797 ; 14.765,-38.987 ccw(c14.848,-38.931) 14.769,-38.992 ; 14.765,-38.987 14.765,-38.987 ; 14.765,-38.987 14.765,-38.987 ; 14.765,-38.987 ccw(c14.848,-38.931) 14.765,-38.987 ; 14.765,-38.987 ccw(c14.848,-38.931) 14.769,-38.992 14.769,-38.992 ; 14.769,-38.992 15.641,-40.133 ; 15.641,-40.133 ccw(c15.721,-40.072) 15.645,-40.138 ; 15.641,-40.133 ccw(c15.721,-40.072) 15.645,-40.138 ; 15.641,-40.133 15.641,-40.133 ; 15.645,-40.138 16.549,-41.182 ; 16.549,-41.182 ccw(c16.625,-41.117) 16.554,-41.187 ; 16.549,-41.182 ccw(c16.625,-41.117) 16.554,-41.187 16.554,-41.187 ; 16.554,-41.187 17.508,-42.161 ; 17.358,4.797 cw(c17.389,4.701) 17.361,4.797 ; 17.358,4.797 cw(c17.389,4.701) 17.36,4.797 ; 17.361,4.797 20.567,5.744 ; 17.36,4.797 17.361,4.797 ; 17.508,-42.161 ccw(c17.58,-42.091) 17.513,-42.165 ; 17.508,-42.161 17.508,-42.161 ccw(c17.58,-42.091) 17.513,-42.165 ; 17.513,-42.165 18.512,-43.066 ; 18.512,-43.066 ccw(c18.579,-42.992) 18.517,-43.07 ; 18.512,-43.066 ccw(c18.579,-42.992) 18.517,-43.07 ; 18.517,-43.07 19.555,-43.894 ; 19.555,-43.894 ccw(c19.617,-43.815) 19.561,-43.898 ; 19.555,-43.894 ccw(c19.617,-43.815) 19.561,-43.898 ; 19.561,-43.898 20.771,-44.734 ; 20.568,5.744 cw(c20.596,5.648) 20.571,5.745 ; 20.567,5.744 cw(c20.596,5.648) 20.571,5.745 ; 20.567,5.744 20.568,5.744 ; 20.571,5.745 ccw(c20.596,5.648) 20.571,5.745 ; 20.571,5.745 23.263,6.447 ; 20.571,5.745 20.571,5.745 ; 20.571,5.745 20.571,5.745 ; 20.771,-44.734 ccw(c20.828,-44.651) 20.777,-44.737 ; 20.771,-44.734 ccw(c20.828,-44.651) 20.777,-44.737 ; 20.777,-44.737 22.06,-45.5 ; 22.06,-45.5 ccw(c22.112,-45.414) 22.066,-45.503 ; 22.06,-45.5 ccw(c22.112,-45.414) 22.066,-45.503 ; 22.066,-45.503 23.414,-46.185 ; 23.263,6.447 cw(c23.288,6.351) 23.263,6.447 ; 23.263,6.447 23.263,6.447 ; 23.263,6.447 cw(c23.288,6.351) 23.267,6.448 ; 23.263,6.447 cw(c23.288,6.351) 23.266,6.448 ; 23.263,6.447 23.263,6.447 ; 23.267,6.448 25.706,6.996 ; 23.266,6.448 23.267,6.448 ; 23.414,-46.185 ccw(c23.459,-46.096) 23.42,-46.188 ; 23.414,-46.185 ccw(c23.459,-46.096) 23.42,-46.188 ; 23.42,-46.188 24.822,-46.785 ; 24.822,-46.785 ccw(c24.861,-46.693) 24.828,-46.787 ; 24.822,-46.785 ccw(c24.861,-46.693) 24.828,-46.787 ; 24.828,-46.787 26.325,-47.316 ; 24.828,-46.787 24.828,-46.787 ; 25.707,6.996 cw(c25.729,6.899) 25.71,6.997 ; 25.706,6.996 cw(c25.729,6.899) 25.71,6.997 ; 25.706,6.996 25.707,6.996 ; 25.711,6.997 ccw(c25.729,6.899) 25.71,6.997 ; 25.711,6.997 28.012,7.428 ; 25.71,6.997 25.711,6.997 ; 25.71,6.997 25.71,6.997 ; 26.325,-47.316 ccw(c26.359,-47.222) 26.331,-47.318 ; 26.326,-47.316 ccw(c26.359,-47.222) 26.331,-47.318 ; 26.325,-47.316 26.326,-47.316 ; 26.331,-47.318 ccw(c26.359,-47.222) 26.331,-47.318 ; 26.331,-47.318 27.932,-47.777 ; 26.331,-47.318 26.331,-47.318 ; 26.331,-47.318 26.331,-47.318 ; 27.932,-47.777 ccw(c27.959,-47.681) 27.937,-47.779 ; 27.932,-47.777 ccw(c27.959,-47.681) 27.937,-47.779 ; 27.932,-47.777 ccw(c27.959,-47.681) 27.932,-47.777 ; 27.932,-47.777 27.932,-47.777 ; 27.932,-47.777 27.932,-47.777 ; 27.937,-47.779 29.647,-48.166 ; 28.012,7.429 cw(c28.03,7.33) 28.016,7.429 ; 28.012,7.429 ccw(c28.03,7.33) 28.012,7.428 ; 28.012,7.429 cw(c28.03,7.33) 28.016,7.429 ; 28.012,7.429 28.012,7.429 ; 28.012,7.428 28.012,7.429 ; 28.016,7.429 30.507,7.798 ; 28.016,7.429 28.016,7.429 ; 29.647,-48.166 ccw(c29.669,-48.068) 29.652,-48.167 ; 29.647,-48.166 ccw(c29.669,-48.068) 29.652,-48.167 ; 29.652,-48.167 31.463,-48.475 ; 30.507,7.798 cw(c30.522,7.699) 30.511,7.799 ; 30.507,7.798 30.507,7.798 cw(c30.522,7.699) 30.511,7.799 ; 30.511,7.799 33.022,8.069 ; 30.511,7.799 30.511,7.799 ; 31.463,-48.475 ccw(c31.48,-48.376) 31.468,-48.475 31.468,-48.475 ; 31.463,-48.475 ccw(c31.48,-48.376) 31.468,-48.475 ; 31.468,-48.475 33.387,-48.701 ; 33.022,8.069 cw(c33.033,7.97) 33.025,8.07 ; 33.022,8.069 ccw(c33.033,7.97) 33.022,8.069 ; 33.022,8.069 cw(c33.033,7.97) 33.026,8.07 ; 33.022,8.069 33.022,8.069 ; 33.022,8.069 33.022,8.069 ; 33.026,8.07 ccw(c33.033,7.97) 33.025,8.07 ; 33.026,8.07 35.658,8.255 ; 33.026,8.07 33.026,8.07 ; 33.025,8.07 33.026,8.07 ; 33.387,-48.701 ccw(c33.399,-48.601) 33.392,-48.701 ; 33.387,-48.701 ccw(c33.399,-48.601) 33.392,-48.701 ; 33.387,-48.701 33.387,-48.701 ; 33.392,-48.701 35.436,-48.842 ; 33.392,-48.701 33.392,-48.701 ; 35.436,-48.842 ccw(c35.443,-48.742) 35.441,-48.842 ; 35.436,-48.842 ccw(c35.443,-48.742) 35.441,-48.842 ; 35.436,-48.842 35.436,-48.842 ; 35.441,-48.842 37.635,-48.894 ; 35.658,8.255 cw(c35.665,8.155) 35.662,8.255 ; 35.659,8.255 ccw(c35.665,8.155) 35.658,8.255 ; 35.659,8.255 cw(c35.665,8.155) 35.662,8.255 ; 35.658,8.255 35.659,8.255 ; 35.658,8.255 35.658,8.255 ; 35.662,8.255 38.564,8.363 ; 37.635,-48.894 ccw(c37.637,-48.794) 37.639,-48.894 ; 37.635,-48.894 ccw(c37.637,-48.794) 37.639,-48.894 ; 37.639,-48.894 40.021,-48.852 ; 38.564,8.363 cw(c38.568,8.263) 38.567,8.363 ; 38.564,8.363 cw(c38.568,8.263) 38.567,8.363 ; 38.567,8.363 42.465,8.4 ; 38.567,8.363 38.567,8.363 ; 40.021,-48.852 ccw(c40.019,-48.752) 40.026,-48.852 ; 40.021,-48.852 ccw(c40.019,-48.752) 40.025,-48.852 40.026,-48.852 ; 40.026,-48.852 42.104,-48.727 ; 42.104,-48.727 ccw(c42.098,-48.627) 42.109,-48.727 ; 42.104,-48.727 ccw(c42.098,-48.627) 42.109,-48.727 ; 42.104,-48.727 42.104,-48.727 ; 42.109,-48.727 44.02,-48.526 ; 42.109,-48.727 42.109,-48.727 ; 42.466,8.4 cw(c42.467,8.3) 42.468,8.4 ; 42.465,8.4 cw(c42.467,8.3) 42.467,8.4 42.468,8.4 ; 42.465,8.4 42.466,8.4 ; 42.468,8.4 49.394,8.356 ; 44.021,-48.526 ccw(c44.01,-48.426) 44.025,-48.525 ; 44.02,-48.526 ccw(c44.01,-48.426) 44.025,-48.525 ; 44.02,-48.526 44.021,-48.526 ; 44.025,-48.525 ccw(c44.01,-48.426) 44.025,-48.525 ; 44.025,-48.525 45.811,-48.252 ; 44.025,-48.525 44.025,-48.525 ; 44.025,-48.525 44.025,-48.525 ; 45.811,-48.252 ccw(c45.796,-48.153) 45.816,-48.251 ; 45.811,-48.252 ccw(c45.796,-48.153) 45.816,-48.251 ; 45.811,-48.252 ccw(c45.796,-48.153) 45.811,-48.252 ; 45.811,-48.252 45.811,-48.252 ; 45.811,-48.252 45.811,-48.252 ; 45.816,-48.251 ccw(c45.796,-48.153) 45.816,-48.251 ; 45.816,-48.251 47.486,-47.909 ; 45.816,-48.251 45.816,-48.251 ; 45.816,-48.251 45.816,-48.251 ; 47.486,-47.909 ccw(c47.466,-47.811) 47.486,-47.909 ; 47.486,-47.909 ccw(c47.466,-47.811) 47.491,-47.908 ; 47.486,-47.909 47.486,-47.909 ; 47.486,-47.909 47.486,-47.909 ; 47.486,-47.909 ccw(c47.466,-47.811) 47.491,-47.908 ; 47.491,-47.908 49.057,-47.5 ; 49.057,-47.5 ccw(c49.032,-47.404) 49.063,-47.499 ; 49.057,-47.5 ccw(c49.032,-47.404) 49.063,-47.499 49.063,-47.499 ; 49.063,-47.499 50.713,-46.969 ; 49.394,8.356 ccw(c49.394,8.256) 49.394,8.356 ; 49.394,8.356 55.358,8.336 ; 49.394,8.356 49.395,8.356 ; 50.714,-46.969 ccw(c50.683,-46.873) 50.719,-46.967 ; 50.713,-46.969 ccw(c50.683,-46.873) 50.719,-46.967 ; 50.713,-46.969 50.714,-46.969 ; 50.719,-46.967 ccw(c50.683,-46.873) 50.719,-46.967 ; 50.719,-46.967 50.719,-46.967 ; 50.719,-46.967 52.353,-46.335 ; 50.719,-46.967 50.719,-46.967 ; 52.353,-46.335 ccw(c52.317,-46.242) 52.354,-46.335 ; 52.353,-46.335 52.353,-46.335 ; 52.353,-46.335 ccw(c52.317,-46.242) 52.359,-46.333 ; 52.354,-46.335 ccw(c52.317,-46.242) 52.359,-46.333 ; 52.353,-46.335 52.354,-46.335 ; 52.359,-46.333 ccw(c52.317,-46.242) 52.359,-46.333 ; 52.359,-46.333 52.359,-46.333 ; 52.359,-46.333 53.972,-45.6 ; 52.359,-46.333 52.359,-46.333 ; 53.972,-45.6 ccw(c53.931,-45.509) 53.972,-45.6 ; 53.972,-45.6 53.972,-45.6 ; 53.972,-45.6 ccw(c53.931,-45.509) 53.977,-45.597 ; 53.972,-45.6 ccw(c53.931,-45.509) 53.977,-45.597 ; 53.972,-45.6 53.972,-45.6 ; 53.977,-45.597 55.349,-44.876 ; 55.349,-44.876 ccw(c55.302,-44.787) 55.354,-44.872 ; 55.349,-44.876 ccw(c55.302,-44.787) 55.354,-44.873 ; 55.354,-44.873 ccw(c55.302,-44.787) 55.355,-44.872 ; 55.354,-44.872 55.355,-44.872 ; 55.354,-44.873 55.354,-44.872 ; 55.355,-44.872 56.536,-44.152 ; 55.358,8.336 cw(c55.358,8.236) 55.359,8.336 ; 55.358,8.336 cw(c55.358,8.236) 55.359,8.336 ; 55.359,8.336 59.38,8.286 ; 56.536,-44.152 ccw(c56.484,-44.067) 56.536,-44.152 ; 56.536,-44.152 56.536,-44.152 ; 56.536,-44.152 ccw(c56.484,-44.067) 56.541,-44.148 ; 56.536,-44.152 ccw(c56.484,-44.067) 56.542,-44.148 ; 56.536,-44.152 56.536,-44.152 ; 56.541,-44.148 ccw(c56.484,-44.067) 56.542,-44.148 ; 56.541,-44.148 56.542,-44.148 ; 56.542,-44.148 57.579,-43.414 ; 56.542,-44.148 56.542,-44.148 ; 57.58,-43.414 ccw(c57.522,-43.332) 57.585,-43.41 ; 57.58,-43.414 ccw(c57.522,-43.332) 57.585,-43.41 ; 57.579,-43.414 ccw(c57.522,-43.332) 57.58,-43.414 ; 57.58,-43.414 57.58,-43.414 ; 57.579,-43.414 57.58,-43.414 ; 57.585,-43.41 58.506,-42.652 ; 58.506,-42.652 ccw(c58.442,-42.575) 58.513,-42.646 ; 58.506,-42.652 ccw(c58.442,-42.575) 58.512,-42.646 58.513,-42.646 ; 58.513,-42.646 59.254,-41.92 ; 59.254,-41.92 ccw(c59.185,-41.848) 59.261,-41.913 ; 59.254,-41.92 59.255,-41.92 ccw(c59.185,-41.848) 59.261,-41.913 ; 59.261,-41.913 59.843,-41.222 ; 59.38,8.286 cw(c59.379,8.186) 59.383,8.286 ; 59.38,8.286 cw(c59.379,8.186) 59.383,8.286 ; 59.383,8.286 61.288,8.195 ; 59.843,-41.222 ccw(c59.766,-41.157) 59.848,-41.214 ; 59.843,-41.222 ccw(c59.766,-41.157) 59.848,-41.214 ; 59.848,-41.214 60.431,-40.372 ; 60.431,-40.372 ccw(c60.348,-40.316) 60.435,-40.365 ; 60.431,-40.372 ccw(c60.348,-40.316) 60.435,-40.365 ; 60.435,-40.365 ccw(c60.348,-40.316) 60.435,-40.365 ; 60.435,-40.365 60.981,-39.403 ; 60.435,-40.365 60.435,-40.365 ; 60.435,-40.365 60.435,-40.365 ; 60.981,-39.403 ccw(c60.894,-39.354) 60.985,-39.396 ; 60.981,-39.403 ccw(c60.894,-39.354) 60.985,-39.396 ; 60.981,-39.403 ccw(c60.894,-39.354) 60.981,-39.403 ; 60.981,-39.403 60.981,-39.403 ; 60.981,-39.403 60.981,-39.403 ; 60.985,-39.396 61.508,-38.279 ; 60.985,-39.396 60.985,-39.396 ; 61.288,8.195 cw(c61.283,8.095) 61.293,8.194 ; 61.288,8.195 cw(c61.283,8.095) 61.293,8.194 ; 61.293,8.194 62.854,8.038 ; 61.508,-38.279 ccw(c61.417,-38.237) 61.51,-38.273 ; 61.508,-38.279 ccw(c61.417,-38.237) 61.51,-38.273 ; 61.508,-38.279 61.508,-38.279 ; 61.51,-38.273 62.047,-36.912 ; 62.047,-36.912 ccw(c61.953,-36.875) 62.048,-36.908 ; 62.047,-36.912 ccw(c61.953,-36.875) 62.048,-36.908 ; 62.048,-36.908 62.813,-34.67 ; 62.048,-36.908 62.048,-36.908 ; 62.813,-34.669 ccw(c62.719,-34.637) 62.815,-34.666 ; 62.813,-34.67 ccw(c62.719,-34.637) 62.814,-34.666 ; 62.813,-34.67 62.813,-34.669 ; 62.815,-34.666 63.899,-31.089 ; 62.814,-34.666 62.815,-34.666 ; 62.854,8.038 cw(c62.844,7.938) 62.858,8.038 ; 62.854,8.038 cw(c62.844,7.938) 62.858,8.038 ; 62.858,8.038 64.945,7.756 67.378,7.49 67.869,7.75 ; 63.899,-31.088 ccw(c63.803,-31.059) 63.899,-31.087 ; 63.899,-31.089 ccw(c63.803,-31.059) 63.899,-31.087 ; 63.899,-31.089 63.899,-31.088 ; 63.899,-31.087 ccw(c63.803,-31.059) 63.899,-31.087 ; 63.899,-31.087 65.837,-24.475 ; 63.899,-31.087 63.899,-31.087 ; 63.899,-31.087 63.899,-31.087 ; 65.837,-24.475 66.698,-21.726 67.291,-20.866 67.984,-20.07 68.761,-19.357 69.613,-18.736 70.53,-18.214 71.499,-17.799 72.509,-17.494 73.546,-17.305 74.604,-17.232 ; 67.87,7.75 cw(c67.917,7.661) 67.885,7.756 ; 67.869,7.75 cw(c67.917,7.661) 67.885,7.756 ; 67.869,7.75 67.87,7.75 ; 67.885,7.756 68.387,7.923 ; 68.387,7.923 cw(c68.418,7.828) 68.4,7.926 ; 68.387,7.923 cw(c68.418,7.828) 68.4,7.926 ; 68.4,7.926 ccw(c68.418,7.828) 68.4,7.926 ; 68.4,7.926 68.773,7.995 ; 68.4,7.926 68.4,7.926 ; 68.4,7.926 68.4,7.926 ; 68.773,7.995 cw(c68.791,7.897) 68.773,7.995 ; 68.773,7.995 68.773,7.995 ; 68.773,7.995 cw(c68.791,7.897) 68.785,7.997 ; 68.773,7.995 cw(c68.791,7.897) 68.785,7.997 ; 68.773,7.995 68.773,7.995 ; 68.785,7.997 69.164,8.02 ; 69.164,8.02 cw(c69.17,7.92) 69.17,8.02 ; 69.164,8.02 cw(c69.17,7.92) 69.17,8.02 ; 69.17,8.02 72.624,8.02 ; 72.624,8.02 cw(c72.624,7.92) 72.632,8.02 ; 72.624,8.02 cw(c72.624,7.92) 72.632,8.02 ; 72.632,8.02 ccw(c72.624,7.92) 72.632,8.02 ; 72.632,8.02 74.955,7.833 75.223,7.837 ; 72.632,8.02 72.632,8.02 ; 72.632,8.02 72.632,8.02 ; 74.604,-17.232 ccw(c74.597,-17.133) 74.682,-17.186 ; 74.604,-17.232 74.604,-17.232 ccw(c74.597,-17.133) 74.682,-17.186 ; 74.682,-17.186 75.049,-17.014 ; 75.049,-17.014 ccw(c75.007,-16.924) 75.058,-17.01 75.058,-17.01 ; 75.049,-17.014 ccw(c75.007,-16.924) 75.058,-17.01 ; 75.058,-17.01 75.468,-16.768 ; 75.223,7.837 cw(c75.225,7.737) 75.241,7.836 ; 75.223,7.837 cw(c75.225,7.737) 75.242,7.836 ; 75.242,7.836 ccw(c75.225,7.737) 75.241,7.836 ; 75.242,7.836 75.527,7.787 ; 75.242,7.836 75.242,7.836 ; 75.241,7.836 75.242,7.836 ; 75.468,-16.768 ccw(c75.418,-16.682) 75.484,-16.757 ; 75.468,-16.768 ccw(c75.418,-16.682) 75.483,-16.757 ; 75.468,-16.768 75.468,-16.768 ; 75.483,-16.757 ccw(c75.418,-16.682) 75.484,-16.757 ; 75.484,-16.757 75.484,-16.757 ; 75.483,-16.757 75.484,-16.757 ; 75.484,-16.757 75.819,-16.462 ; 75.527,7.787 cw(c75.51,7.688) 75.527,7.787 ; 75.527,7.787 75.527,7.787 ; 75.527,7.787 cw(c75.51,7.688) 75.543,7.783 ; 75.527,7.787 cw(c75.51,7.688) 75.543,7.783 ; 75.527,7.787 75.527,7.787 ; 75.543,7.783 75.78,7.701 ; 75.78,7.701 cw(c75.747,7.606) 75.793,7.695 ; 75.78,7.701 cw(c75.747,7.606) 75.793,7.695 ; 75.793,7.695 76.022,7.576 ; 75.793,7.695 75.793,7.695 ; 75.819,-16.462 ccw(c75.753,-16.387) 75.819,-16.462 ; 75.819,-16.462 75.819,-16.462 ; 75.819,-16.462 ccw(c75.753,-16.387) 75.827,-16.454 ; 75.819,-16.462 75.819,-16.462 ; 75.819,-16.462 ccw(c75.753,-16.387) 75.827,-16.454 ; 75.827,-16.454 75.944,-16.324 ; 75.944,-16.324 ccw(c75.87,-16.257) 75.95,-16.318 ; 75.944,-16.324 ccw(c75.87,-16.257) 75.949,-16.318 ; 75.949,-16.318 ccw(c75.87,-16.257) 75.95,-16.318 ; 75.95,-16.318 76.059,-16.174 ; 75.95,-16.318 75.95,-16.318 ; 75.949,-16.318 75.95,-16.318 ; 76.022,7.576 cw(c75.976,7.487) 76.032,7.57 ; 76.022,7.576 cw(c75.976,7.487) 76.032,7.57 ; 76.022,7.576 76.022,7.576 ; 76.032,7.57 76.199,7.457 ; 76.059,-16.174 ccw(c75.979,-16.114) 76.066,-16.163 ; 76.059,-16.174 ccw(c75.979,-16.114) 76.059,-16.174 ; 76.059,-16.174 76.059,-16.174 ; 76.059,-16.174 76.059,-16.174 ; 76.059,-16.174 ccw(c75.979,-16.114) 76.066,-16.163 ; 76.066,-16.163 76.24,-15.859 ; 76.199,7.457 cw(c76.143,7.374) 76.206,7.452 ; 76.199,7.457 cw(c76.143,7.374) 76.205,7.452 76.206,7.452 ; 76.206,7.452 76.303,7.373 ; 76.24,-15.859 ccw(c76.153,-15.81) 76.247,-15.843 ; 76.24,-15.859 ccw(c76.153,-15.81) 76.247,-15.843 ; 76.247,-15.843 76.364,-15.508 ; 76.303,7.373 cw(c76.24,7.295) 76.308,7.369 ; 76.303,7.373 76.303,7.373 cw(c76.24,7.295) 76.308,7.369 ; 76.308,7.369 76.4,7.284 ; 76.364,-15.508 ccw(c76.269,-15.476) 76.368,-15.49 ; 76.364,-15.508 ccw(c76.269,-15.476) 76.368,-15.49 ; 76.368,-15.49 76.418,-15.147 ; 76.368,-15.49 76.368,-15.49 ; 76.4,7.284 cw(c76.333,7.21) 76.409,7.275 ; 76.4,7.284 cw(c76.333,7.21) 76.41,7.275 ; 76.409,7.275 76.41,7.275 ; 76.41,7.275 76.652,6.987 ; 76.418,-15.147 ccw(c76.319,-15.133) 76.419,-15.136 ; 76.418,-15.147 ccw(c76.319,-15.133) 76.419,-15.136 ; 76.418,-15.147 76.418,-15.147 ; 76.419,-15.136 ccw(c76.319,-15.133) 76.419,-15.136 ; 76.419,-15.136 76.602,-9.367 ; 76.419,-15.136 76.419,-15.136 ; 76.419,-15.136 76.419,-15.136 ; 76.602,-9.367 ccw(c76.502,-9.364) 76.602,-9.367 ; 76.602,-9.367 ccw(c76.502,-9.364) 76.602,-9.367 ; 76.602,-9.367 76.783,-3.599 ; 76.602,-9.367 76.602,-9.367 ; 76.652,6.987 cw(c76.576,6.923) 76.663,6.971 ; 76.652,6.987 76.652,6.987 cw(c76.576,6.923) 76.663,6.971 ; 76.663,6.971 76.866,6.607 ; 76.783,-3.599 ccw(c76.683,-3.596) 76.783,-3.598 ; 76.783,-3.599 ccw(c76.683,-3.596) 76.783,-3.599 ; 76.783,-3.599 76.783,-3.598 ; 76.783,-3.598 77.067,5.629 ; 76.866,6.607 cw(c76.779,6.558) 76.874,6.589 ; 76.866,6.607 cw(c76.779,6.558) 76.874,6.589 ; 76.874,6.589 76.874,6.589 ; 76.874,6.589 77.01,6.169 ; 77.01,6.169 cw(c76.915,6.138) 77.014,6.154 ; 77.01,6.169 77.01,6.169 cw(c76.915,6.138) 77.014,6.153 ; 77.014,6.154 77.014,6.153 ; 77.014,6.153 77.054,5.901 ; 77.054,5.901 cw(c76.955,5.885) 77.055,5.89 77.055,5.889 ; 77.054,5.901 77.054,5.901 cw(c76.955,5.885) 77.055,5.889 ; 77.055,5.889 77.067,5.637 ; 77.067,5.629 ccw(c76.967,5.632) 77.067,5.632 ; 77.067,5.629 ccw(c76.967,5.632) 77.067,5.632 ; 77.067,5.629 77.067,5.629 ; 77.067,5.632 ccw(c76.967,5.632) 77.067,5.637 77.067,5.637 ; 77.067,5.632 ccw(c76.967,5.632) 77.067,5.637

## Silkscreen, mask and mechanical layers (free items; w line width, h text height)
Bottom Overlay:
  text "David and Patrick" at -31.125,4.445 h1.52
  text "1" at -34.534,2.921 h2.03
  text "Research@Scale 2019" at -31.125,2.032 h1.52
  text "v1.2" at -58.42,-1.422 h1.27
Mechanical 1:
  drawing of 250 lines, arcs and shapes, not listed
  text "This side faces out to the world; left is thermopile/power, right is STM and QRE." at -72.253,25.527 h1.02
  text "need to fix nose bridge to swap sides to match this" at -72.888,21.336 h1.02
Mechanical 15:
  drawing of 994 lines, arcs and shapes, not listed